# EAGLE board BareBonesArduino (EAGLE 7.5.0)
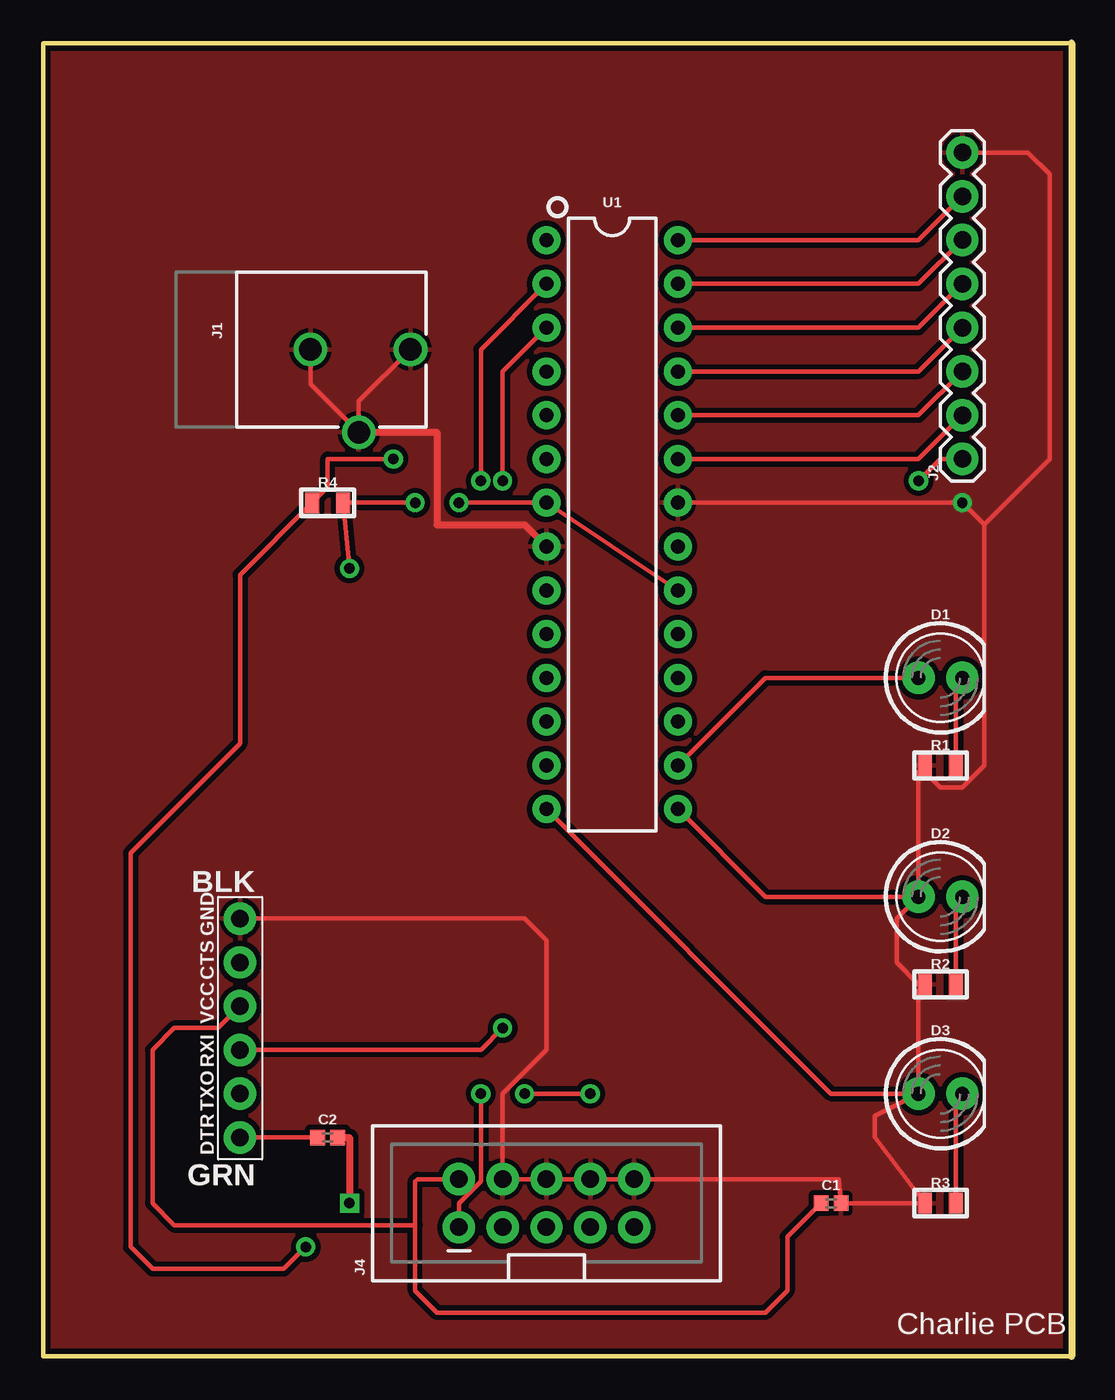
[diagram p0: board, top side]
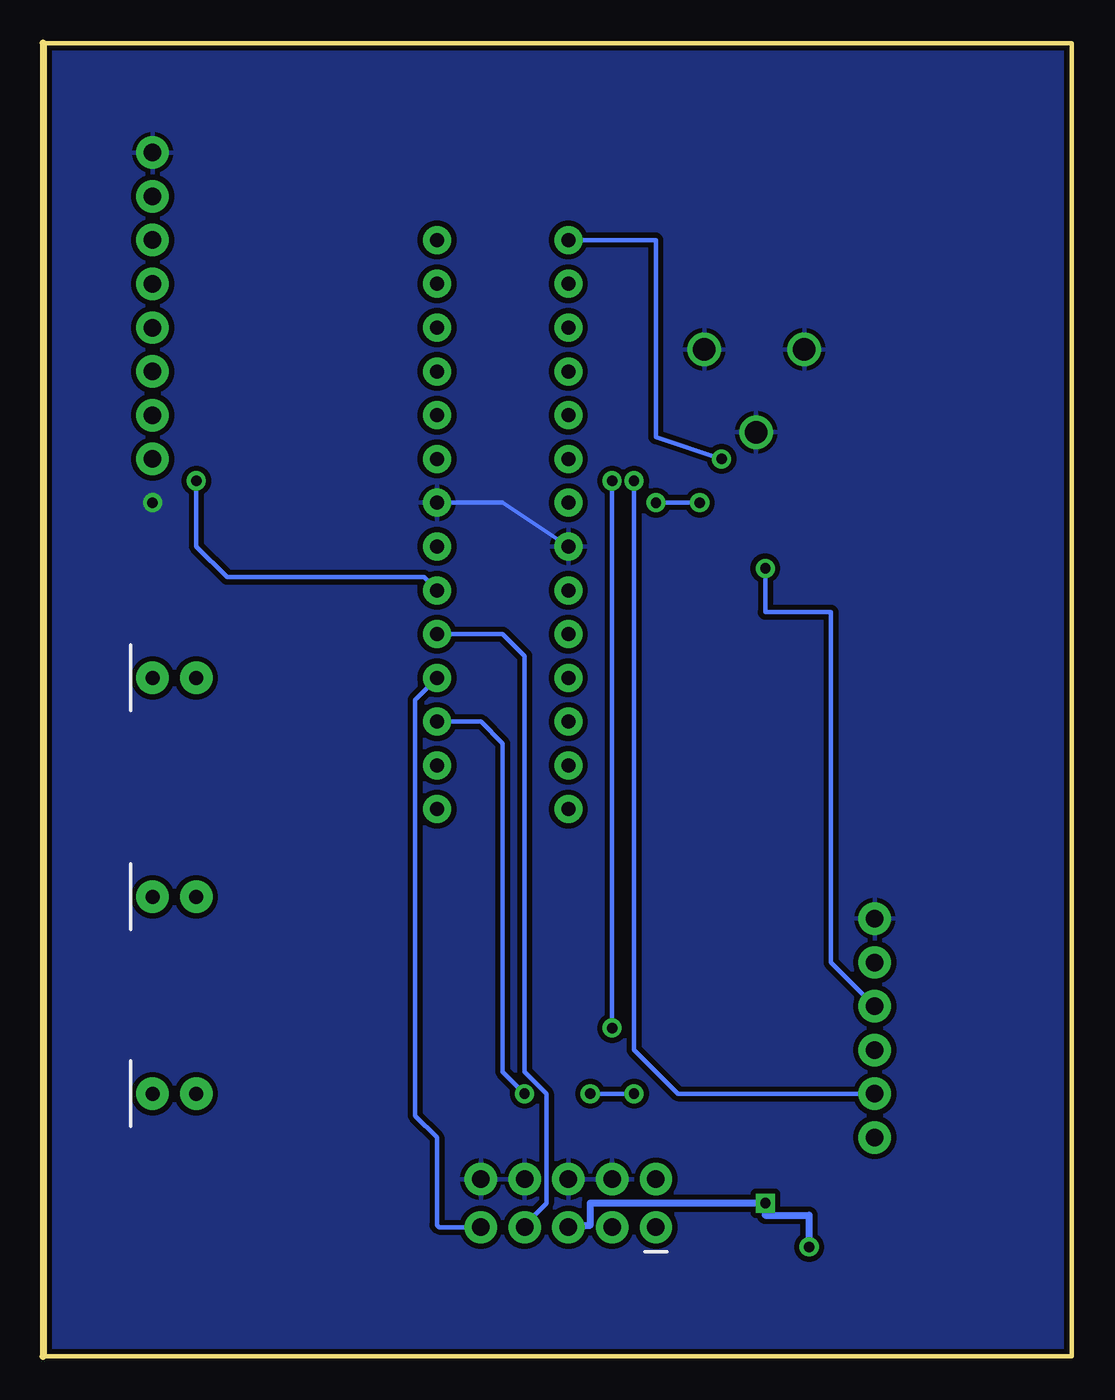
[diagram p1: board, bottom side, seen from below]

Size 59.69 x 76.2 mm. Coordinates in mm from the lower left corner, seen from the top.
Outline: 0,0 0,76.2 59.69,76.2 59.69,0 0,0
Copper layers (1*16): Top 0.035mm / dielectric 1.5mm / Bottom 0.035mm
Design rules "SparkFun": minimum track width 8mil, minimum drill 20mil, track to track 8mil, track to pad 8mil, pad to pad 8mil, via to via 8mil, smd to smd 8mil, copper to edge 8mil, drill to drill 8mil, minimum pad ring 12mil, minimum via ring 10mil, stop-mask expansion 4mil, vias tented up to drill 20mil, thermal gap 10mil

## Footprints (pad centres in the part's own frame; a part is rotated, then mirrored left to right if it is on the bottom)
0402 = smd 0.85 x 0.9: 1 -0.58,0; 2 0.58,0
LED_5MM = drill 0.813 pad 1.88: A -1.27,0; K 1.27,0
POWER_JACK_PTH_BREAD = drill 1.3: GND 0,7.9; GNDBREAK 4.8,10.7; PWR 0,13.7
1X08 = drill 1.016 pad 1.88: 1 0,0; 2 2.54,0; 3 5.08,0; 4 7.62,0; 5 10.16,0; 6 12.7,0; 7 15.24,0; 8 17.78,0
6_PIN_SERIAL_TARGET_SIDE_W_SILK = drill 1.016 pad 1.88: P$1 -6.35,0; P$2 -3.81,0; P$3 -1.27,0; P$4 1.27,0; P$5 3.81,0; P$6 6.35,0
2X5-SHROUDED_LOCK = drill 1.016 pad 1.88: 1 -1.397,5.08; 2 1.397,5.08; 3 -1.397,2.54; 4 1.397,2.54; 5 -1.397,0; 6 1.397,0; 7 -1.397,-2.54; 8 1.397,-2.54; 9 -1.397,-5.08; 10 1.397,-5.08
0805 = smd 0.8 x 1.2: 1 -0.9,0; 2 0.9,0
DIP28 = drill 0.813 pad 1.626: 1 -16.51,-3.81; 2 -13.97,-3.81; 3 -11.43,-3.81; 4 -8.89,-3.81; 5 -6.35,-3.81; 6 -3.81,-3.81; 7 -1.27,-3.81; 8 1.27,-3.81; 9 3.81,-3.81; 10 6.35,-3.81; 11 8.89,-3.81; 12 11.43,-3.81; 13 13.97,-3.81; 14 16.51,-3.81; 15 16.51,3.81; 16 13.97,3.81; 17 11.43,3.81; 18 8.89,3.81; 19 6.35,3.81; 20 3.81,3.81; 21 1.27,3.81; 22 -1.27,3.81; 23 -3.81,3.81; 24 -6.35,3.81; 25 -8.89,3.81; 26 -11.43,3.81; 27 -13.97,3.81; 28 -16.51,3.81

## Placement (x,y rotation side)
C1  0.1uF  [0402]  45.72,8.89 0 top
C2  0.1uF  [0402]  16.51,12.7 0 top
D1  [LED_5MM]  52.07,39.37 0 top
D2  [LED_5MM]  52.07,26.67 0 top
D3  [LED_5MM]  52.07,15.24 0 top
FRAME1  FRAME-LETTER  [CREATIVE_COMMONS]  -101.6,35.56 0 top  (outside the outline)
J1  POWER_JACKPTH_BREAD  [POWER_JACK_PTH_BREAD]  7.62,58.42 270 top
J2  [1X08]  53.34,52.07 90 top
J3  [6_PIN_SERIAL_TARGET_SIDE_W_SILK]  11.43,19.05 90 top
J4  AVR_SPI_PROG_5X2LOCK  [2X5-SHROUDED_LOCK]  29.21,8.89 90 top
R1  0.22  [0805]  52.07,34.29 0 top
R2  0.22  [0805]  52.07,21.59 0 top
R3  0.22  [0805]  52.07,8.89 0 top
R4  0.22  [0805]  16.51,49.53 0 top
U1  328P  [DIP28]  33.02,48.26 270 top

## Library data of the parts
C1 C2 = SparkFun-Capacitors; PROD_ID: CAP-12416
D1-D3 = SparkFun-LED
FRAME1 = SparkFun-Aesthetics
J1 = SparkFun-Connectors; PROD_ID: PRT-10811
J2 = SparkFun-Connectors; PROD_ID: CONN-08438
J3 = SparkFun-Connectors
J4 = SparkFun-Connectors; PROD_ID: CONN-08671; SF_ID: PRT-08506
R1-R4 = SparkFun-Resistors; PROD_ID: RES-09883
U1 = SparkFun-IC-Microcontroller; PROD_ID: IC-09136

## Nets
CTS: J3.P$5
DTR: C2.1 J3.P$1
GND: C1.2 J1.GND J1.GNDBREAK J1.PWR J2.8 J3.P$6 J4.4 J4.6 J4.8 J4.10 R1.1 R2.1 R3.1 U1.8 U1.22
MISO: J4.9 U1.18
MOSI: J4.1 U1.17
N$1: J2.2 U1.23
N$2: J2.3 U1.24
N$3: J2.4 U1.25
N$4: J2.5 U1.26
N$5: J2.6 U1.27
N$6: J2.7 U1.28
N$8: D3.K R3.2
N$9: D2.K R2.2
N$10: D1.K R1.2
N$11: D3.A U1.14
N$12: D2.A U1.15
N$13: D1.A U1.16
RESET: C2.2 J4.5 R4.1 U1.1
RX: J3.P$2 U1.2
SCK: J4.7 U1.19
TX: J3.P$3 U1.3
VCC: C1.1 J2.1 J3.P$4 J4.2 R4.2 U1.7 U1.20

## Tracks (layer width: path | path; a pad name or v marks a point on that pad's centre or on a via)
DTR
  Top 0.254: J3.P$1 C2.1
GND  (via drill 0.6)
  Top 0.254: J1.PWR 18.32,55.42 J1.GNDBREAK 15.52,56.42 J1.GND | J3.P$6 27.94,25.4 29.21,24.13 29.21,17.78 26.67,15.24 J4.4 J4.6 J4.8 J4.10 46.17,10.29 C1.2 R3.1 48.26,12.7 48.26,13.97 50.8,15.24 50.8,21.22 R2.1 50.8,21.59 49.53,22.86 49.53,25.4 50.8,26.67 50.8,33.92 R1.1 51.17,33.92 52.07,33.02 53.34,33.02 54.61,34.29 54.61,48.26 | J2.8 57.15,69.85 58.42,68.58 58.42,52.07 54.61,48.26 | 54.61,48.26 v53.34,49.53 U1.22
  Top 0.406: J1.GNDBREAK 22.86,53.62 22.86,48.26 27.94,48.26 U1.8
  Bottom 0.254: U1.8 33.02,49.53 U1.22
  pour Top (isolate 0.305): 0,0 0,76.2 59.69,76.2 59.69,0
  pour Bottom (isolate 0.305): 0,0 0,76.2 59.69,76.2 59.69,1.27 59.69,0
MISO
  Bottom 0.254: U1.18 38.1,38.1 38.1,13.97 36.83,12.7 36.83,7.62 36.7,7.49 J4.9
MOSI  (via drill 0.6)
  Top 0.254: v31.75,15.24 v27.94,15.24 | v25.4,15.24 25.4,10.16 24.13,8.89 J4.1
  Bottom 0.254: U1.17 34.29,36.83 33.02,35.56 33.02,16.51 v31.75,15.24 | v27.94,15.24 v25.4,15.24
N$1
  Top 0.254: U1.23 50.8,52.07 J2.2
N$2
  Top 0.254: U1.24 50.8,54.61 J2.3
N$3
  Top 0.254: U1.25 50.8,57.15 J2.4
N$4
  Top 0.254: U1.26 50.8,59.69 J2.5
N$5
  Top 0.254: U1.27 50.8,62.23 J2.6
N$6
  Top 0.254: U1.28 50.8,64.77 J2.7
N$8
  Top 0.254: D3.K 52.97,14.87 R3.2
N$9
  Top 0.254: D2.K 52.97,26.3 R2.2
N$10
  Top 0.254: D1.K 52.97,39 R1.2
N$11
  Top 0.254: U1.14 45.72,15.24 D3.A
N$12
  Top 0.254: U1.15 41.91,26.67 D2.A
N$13
  Top 0.254: U1.16 41.91,39.37 D1.A
RESET  (via drill 0.6)
  Top 0.254: v20.32,52.07 16.51,52.07 16.51,50.43 R4.1 11.43,45.35 11.43,35.56 5.08,29.21 5.08,6.35 6.35,5.08 13.97,5.08 v15.24,6.35
  Top 0.406: C2.2 17.78,12.7 v17.78,8.89
  Bottom 0.254: v20.32,52.07 24.13,53.34 24.13,64.77 U1.1
  Bottom 0.406: J4.5 29.21,7.62 27.94,7.62 27.94,8.89 v17.78,8.89 17.78,8.2 15.24,8.2 v15.24,6.35
RX  (via drill 0.6)
  Top 0.254: U1.2 25.4,58.42 v25.4,50.8
  Bottom 0.254: v25.4,50.8 25.4,17.78 22.86,15.24 J3.P$2
SCK
  Bottom 0.254: U1.19 33.02,41.91 31.75,40.64 31.75,16.51 30.48,15.24 30.48,8.89 31.75,7.62 J4.7
TX  (via drill 0.6)
  Top 0.254: U1.3 26.67,57.15 v26.67,50.8 | v26.67,19.05 25.4,17.78 J3.P$3
  Bottom 0.254: v26.67,50.8 v26.67,19.05
VCC  (via drill 0.6)
  Top 0.254: U1.20 U1.7 v24.13,49.53 | v17.78,45.72 R4.2 v21.59,49.53 | C1.1 43.18,6.93 43.18,3.81 41.91,2.54 22.86,2.54 21.59,3.81 21.59,7.62 | 21.59,7.62 21.59,10.16 21.72,10.29 J4.2 | J3.P$4 10.16,19.05 7.62,19.05 6.35,17.78 6.35,8.89 7.62,7.62 21.59,7.62 | J2.1 52.07,52.07 v50.8,50.8
  Bottom 0.254: v17.78,45.72 17.78,43.18 13.97,43.18 13.97,22.86 J3.P$4 | v21.59,49.53 v24.13,49.53 | v50.8,50.8 50.8,46.99 49.02,45.21 37.59,45.21 U1.20

## Text on the board
tPlace: Charlie PCB